# Altium PCB PCB1(pin2).PcbDoc
Units mm, origin at the board's own origin, x right, y up, seen from the top; angles counter-clockwise.
Board outline 100 x 100 mm, 2 copper layers (Top Layer, Bottom Layer); 184 components, 17 nets, 460 pads, 92 vias.
Unrouted connection lines stored in the file: 48.
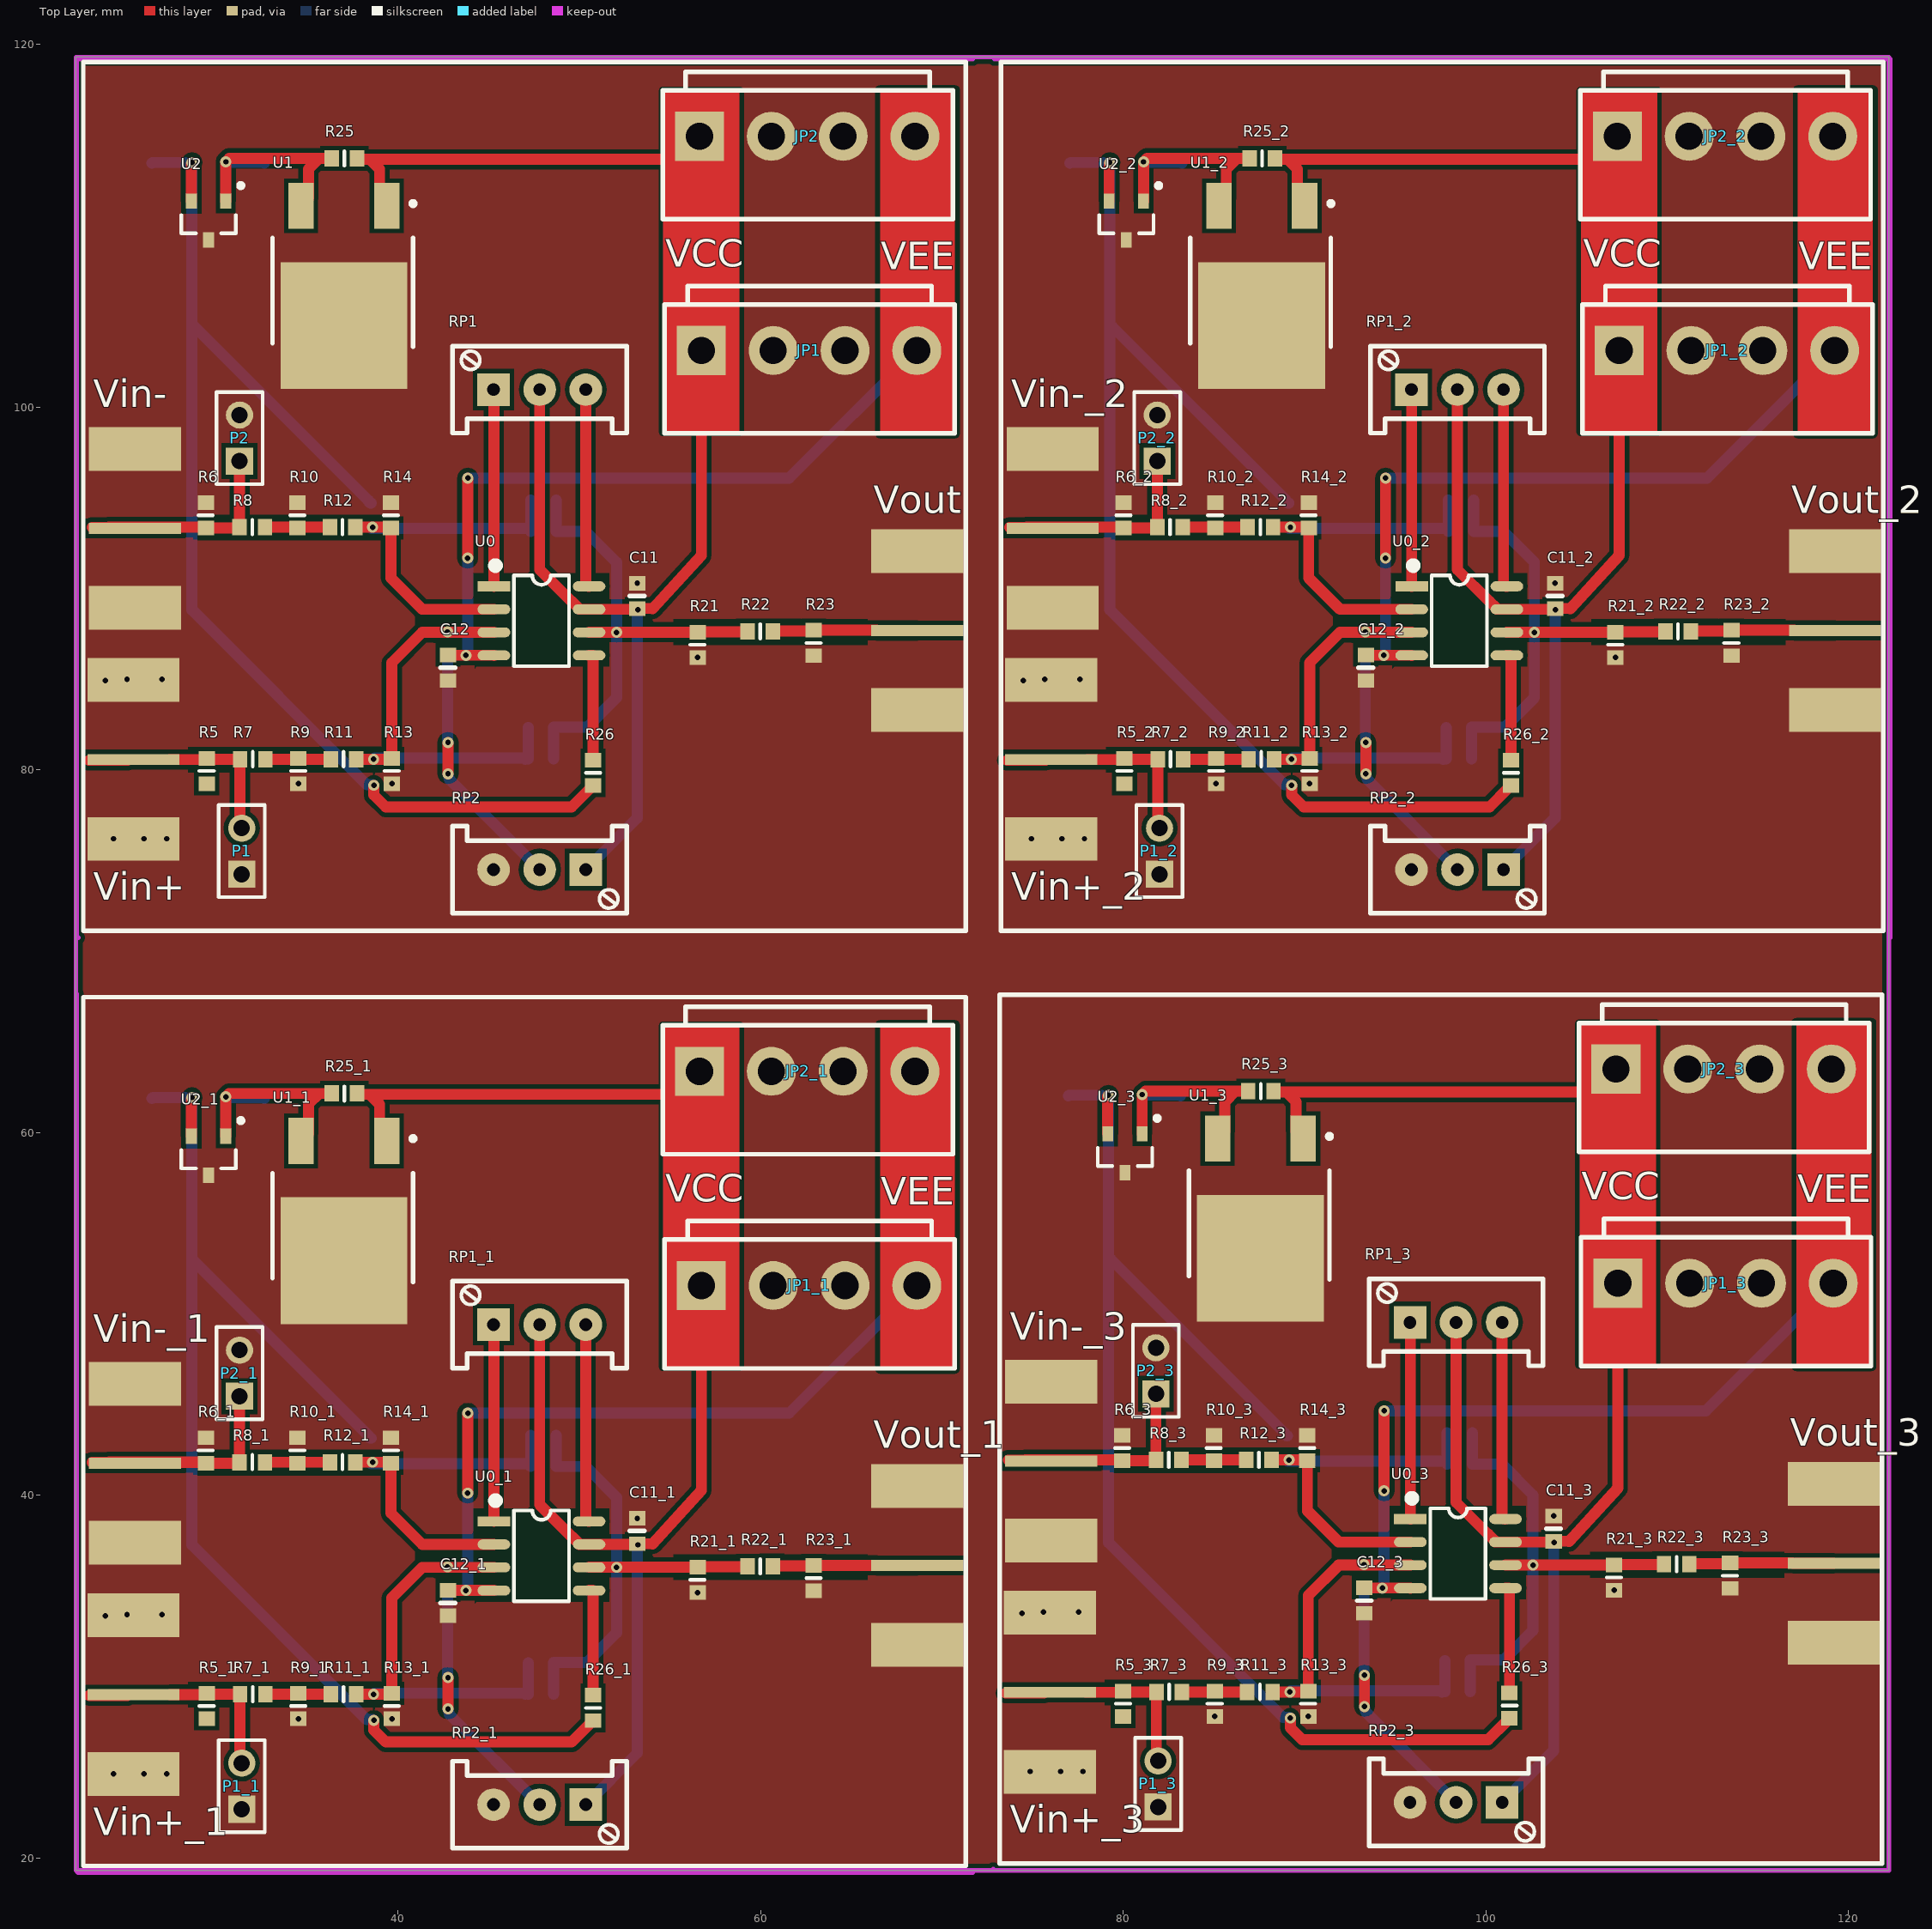
[diagram p0: Top Layer view]
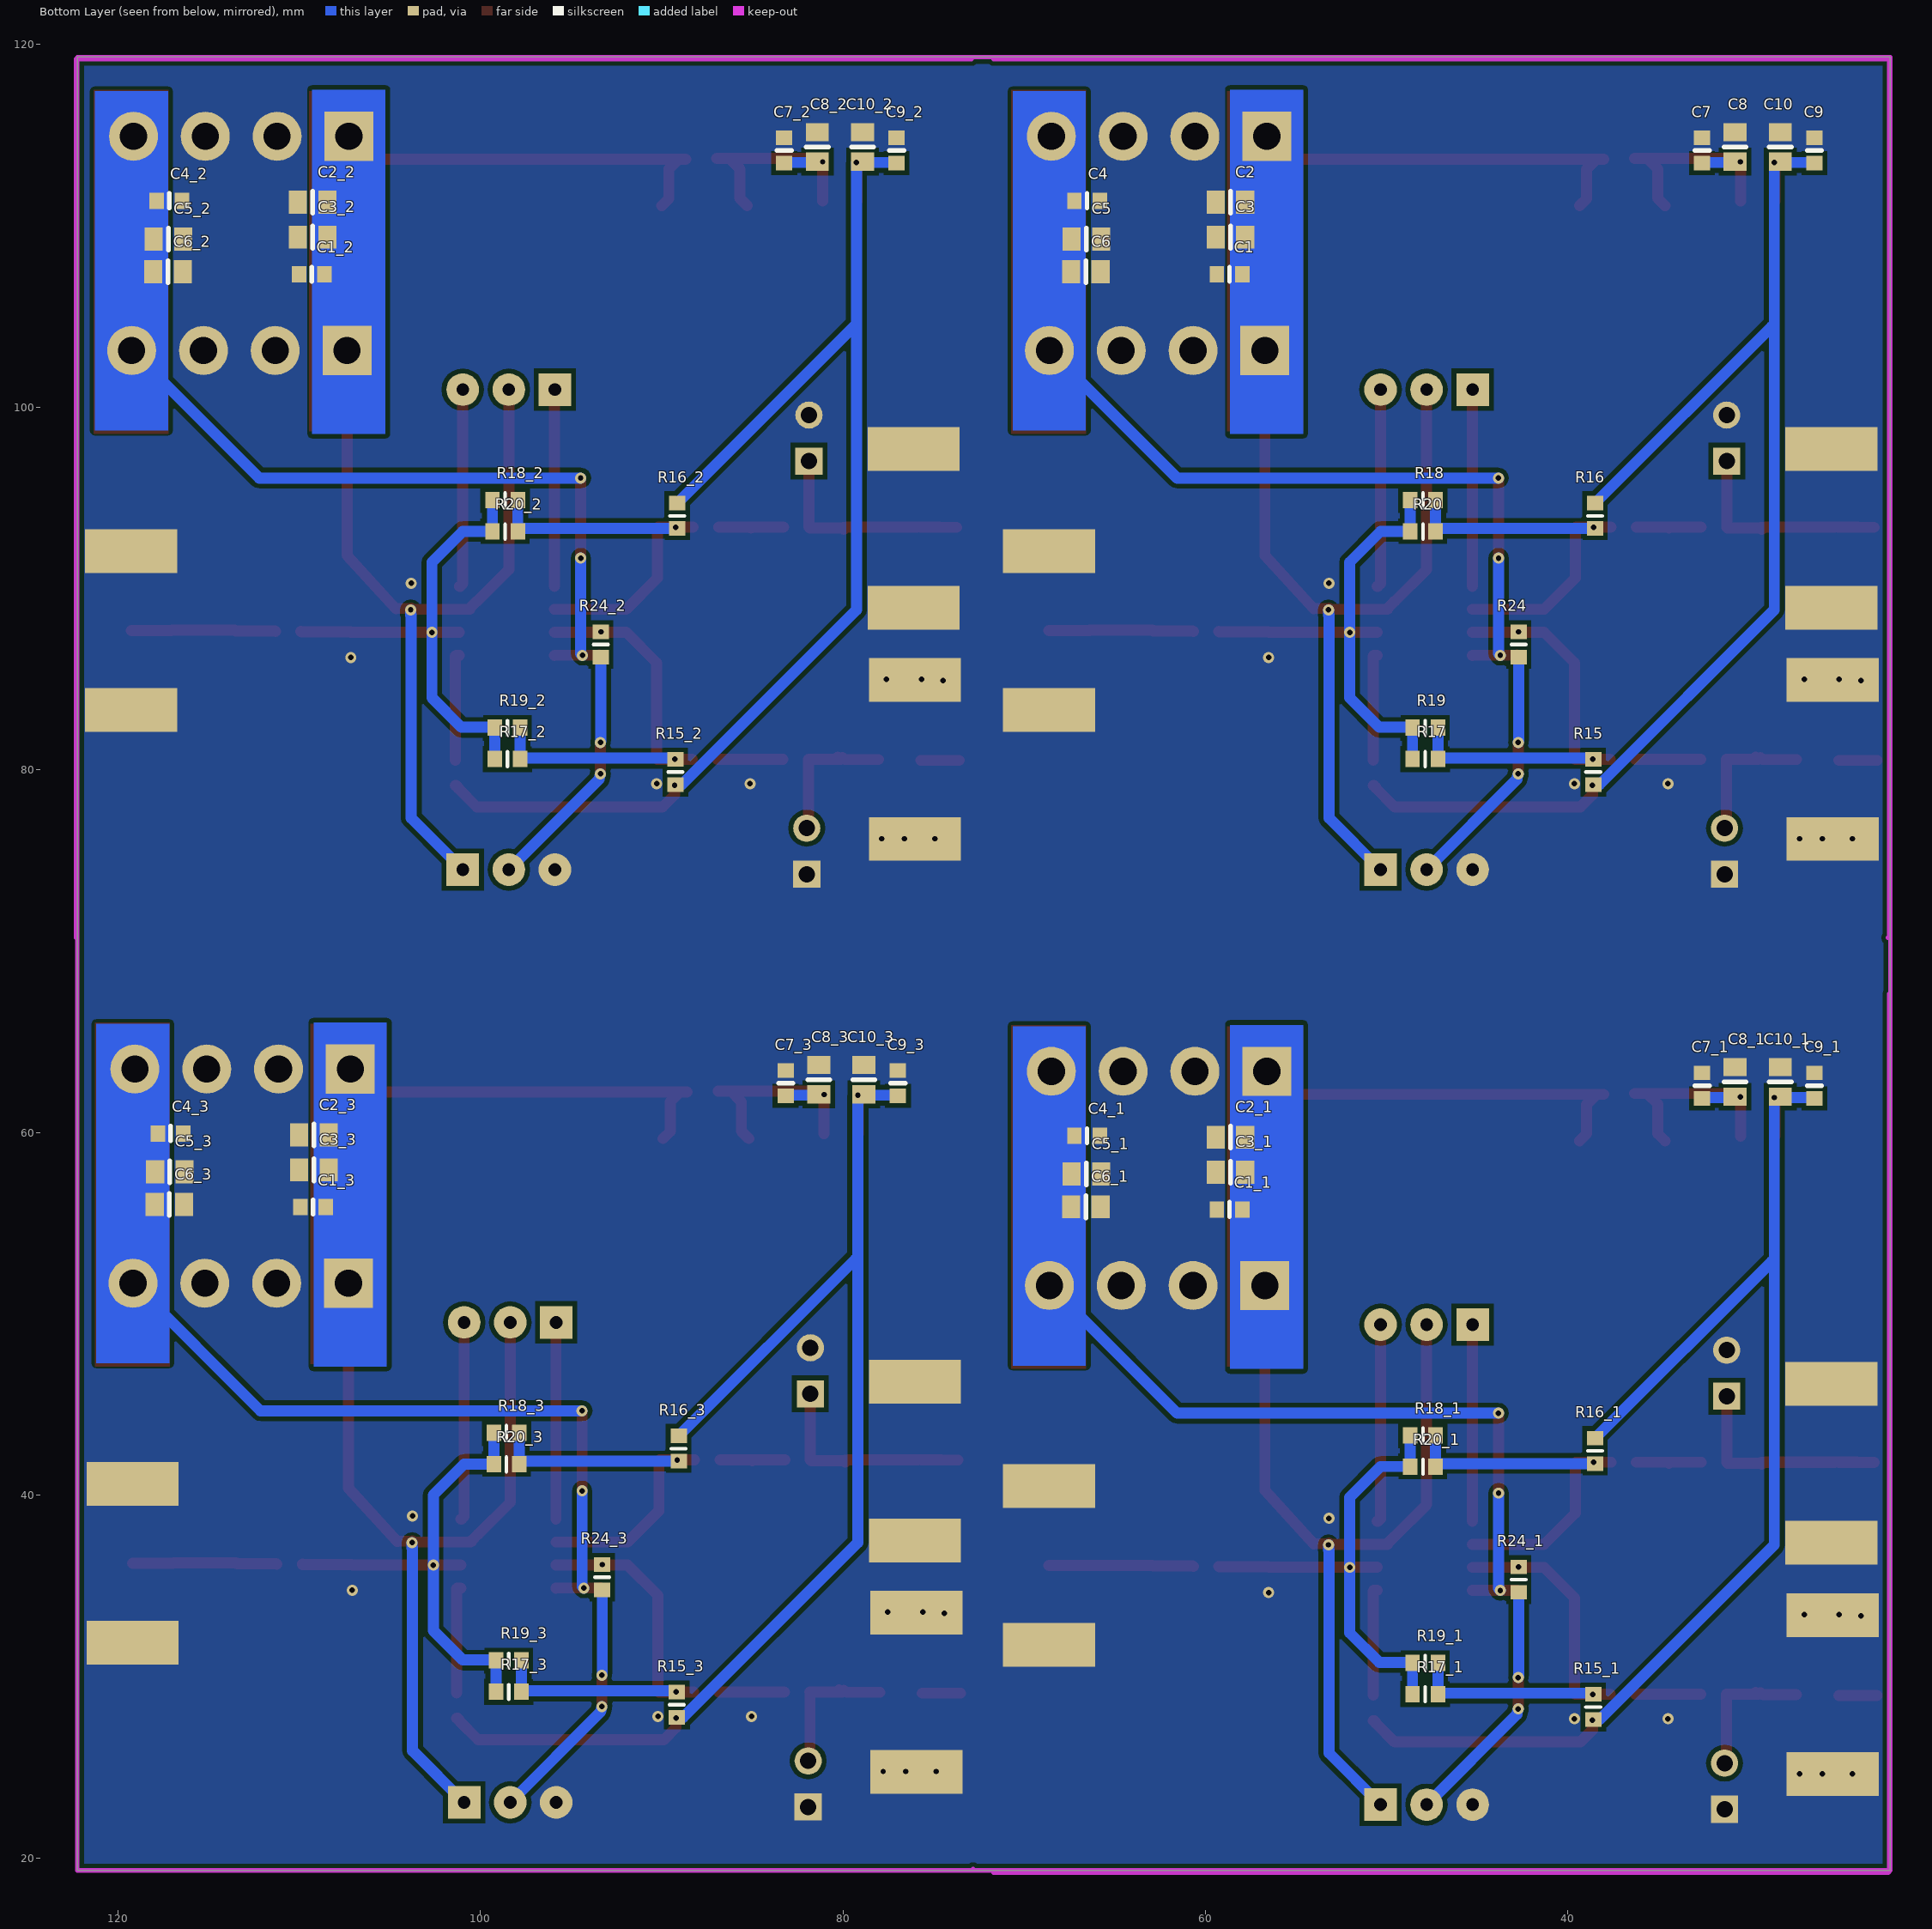
[diagram p1: Bottom Layer view, seen from below]

## Layer stack, top to bottom
Top Solder: solder mask 0.0102, Solder Resist, Dk 3.5
Top Layer: signal copper 0.0356
Dielectric 1: dielectric 0.32, FR-4, Dk 4.8
Bottom Layer: signal copper 0.0356
Bottom Solder: solder mask 0.0102, Solder Resist, Dk 3.5

## Board outline
22.225,19.304 122.225,19.304 122.225,119.304 22.225,119.304

## Design rules (kind name [scope] priority, off if disabled: settings)
Clearance [All] p1: gap=0.254 ignorepadtopadclearanceinfootprint=FALSE except(0: Arc-Hole Track-Hole SMDPad-Hole THPad-Hole Via-Hole Fill-Hole Poly-Hole Region-Hole Text-Hole)
PlaneConnect [All] p1: planeconnectstyle=Direct reliefexpansion=0.508 reliefentries=4 reliefconductorwidth=0.254 reliefairgap=0.254
PolygonConnect [All] p1: connectstyle=Direct reliefconductorwidth=0.254 reliefentries=4 polygonreliefangle="90 Angle" airgapwidth=0.254
RoutingVias [All] p1: holewidth=0.711 width=1.27 viastyle="Through Hole" minholewidth=0.711 minwidth=1.27 maxholewidth=0.711 maxwidth=1.27
SolderMaskExpansion [All] p1: expansion=0.102
Width [All] p1: maxlimit=0.254 minlimit=0.254 preferedwidth=0.254
29 further rules are at their usual default settings.

## Components (designator, comment, footprint, x,y, rotation, side; value= is the part's Value field where it differs from the comment)
C1 "Cap-S" C0603-L 58.674,107.315 r180 bottom value=100nF
C1_1 "Cap-S" C0603-L 58.674,55.753 r180 bottom value=100nF (schematic designator C1)
C1_2 "Cap-S" C0603-L 109.296,107.315 r180 bottom value=100nF (schematic designator C1)
C1_3 "Cap-S" C0603-L 109.22,55.88 r180 bottom value=100nF (schematic designator C1)
C2 "Cap-S" C0805-L 58.623,111.303 r180 bottom value=10μF
C2_1 "Cap-S" C0805-L 58.623,59.741 r180 bottom value=10μF (schematic designator C2)
C2_2 "Cap-S" C0805-L 109.245,111.303 r180 bottom value=10μF (schematic designator C2)
C2_3 "Cap-S" C0805-L 109.169,59.868 r180 bottom value=10μF (schematic designator C2)
C3 "Cap-S" C0805-L 58.623,109.372 r180 bottom value=47μF
C3_1 "Cap-S" C0805-L 58.623,57.81 r180 bottom value=47μF (schematic designator C3)
C3_2 "Cap-S" C0805-L 109.245,109.372 r180 bottom value=47μF (schematic designator C3)
C3_3 "Cap-S" C0805-L 109.169,57.937 r180 bottom value=47μF (schematic designator C3)
C4 "Cap-S" C0603-L 66.532,111.379 r180 bottom value=100nF
C4_1 "Cap-S" C0603-L 66.532,59.817 r180 bottom value=100nF (schematic designator C4)
C4_2 "Cap-S" C0603-L 117.154,111.379 r180 bottom value=100nF (schematic designator C4)
C4_3 "Cap-S" C0603-L 117.078,59.944 r180 bottom value=100nF (schematic designator C4)
C5 "Cap-S" C0805-L 66.573,109.271 r180 bottom value=10μF
C5_1 "Cap-S" C0805-L 66.573,57.709 r180 bottom value=10μF (schematic designator C5)
C5_2 "Cap-S" C0805-L 117.196,109.271 r180 bottom value=10μF (schematic designator C5)
C5_3 "Cap-S" C0805-L 117.12,57.836 r180 bottom value=10μF (schematic designator C5)
C6 "Cap-S" C0805-L 66.599,107.467 r180 bottom value=47μF
C6_1 "Cap-S" C0805-L 66.599,55.905 r180 bottom value=47μF (schematic designator C6)
C6_2 "Cap-S" C0805-L 117.221,107.467 r180 bottom value=47μF (schematic designator C6)
C6_3 "Cap-S" C0805-L 117.145,56.032 r180 bottom value=47μF (schematic designator C6)
C7 "Cap-S" C0603-L 32.614,114.148 r270 bottom value=100nF
C7_1 "Cap-S" C0603-L 32.614,62.586 r270 bottom value=100nF (schematic designator C7)
C7_2 "Cap-S" C0603-L 83.236,114.148 r270 bottom value=100nF (schematic designator C7)
C7_3 "Cap-S" C0603-L 83.16,62.713 r270 bottom value=100nF (schematic designator C7)
C8 "Cap-S" C0805-L 30.785,114.351 r270 bottom value=10μF
C8_1 "Cap-S" C0805-L 30.785,62.789 r270 bottom value=10μF (schematic designator C8)
C8_2 "Cap-S" C0805-L 81.407,114.351 r270 bottom value=10μF (schematic designator C8)
C8_3 "Cap-S" C0805-L 81.331,62.916 r270 bottom value=10μF (schematic designator C8)
C9 "Cap-S" C0603-L 26.416,114.148 r270 bottom value=100nF
C9_1 "Cap-S" C0603-L 26.416,62.586 r270 bottom value=100nF (schematic designator C9)
C9_2 "Cap-S" C0603-L 77.038,114.148 r270 bottom value=100nF (schematic designator C9)
C9_3 "Cap-S" C0603-L 76.962,62.713 r270 bottom value=100nF (schematic designator C9)
C10 "Cap-S" C0805-L 28.296,114.351 r270 bottom value=10μF
C10_1 "Cap-S" C0805-L 28.296,62.789 r270 bottom value=10μF (schematic designator C10)
C10_2 "Cap-S" C0805-L 78.918,114.351 r270 bottom value=10μF (schematic designator C10)
C10_3 "Cap-S" C0805-L 78.842,62.916 r270 bottom value=10μF (schematic designator C10)
C11 "Cap-S" C0603-L 53.188,89.586 r90 top value=100nF
C11_1 "Cap-S" C0603-L 53.188,38.024 r90 top value=100nF (schematic designator C11)
C11_2 "Cap-S" C0603-L 103.81,89.586 r90 top value=100nF (schematic designator C11)
C11_3 "Cap-S" C0603-L 103.734,38.151 r90 top value=100nF (schematic designator C11)
C12 "Cap-S" C0603-L 42.748,85.623 r90 top value=100nF
C12_1 "Cap-S" C0603-L 42.748,34.061 r90 top value=100nF (schematic designator C12)
C12_2 "Cap-S" C0603-L 93.37,85.623 r90 top value=100nF (schematic designator C12)
C12_3 "Cap-S" C0603-L 93.294,34.188 r90 top value=100nF (schematic designator C12)
JP1 "HDR-1X4" VH3.96-LI-4P 62.663,103.124 r0 top
JP1_1 "HDR-1X4" VH3.96-LI-4P 62.663,51.562 r0 top (schematic designator JP1)
JP1_2 "HDR-1X4" VH3.96-LI-4P 113.285,103.124 r0 top (schematic designator JP1)
JP1_3 "HDR-1X4" VH3.96-LI-4P 113.209,51.689 r0 top (schematic designator JP1)
JP2 "HDR-1X4" VH3.96-LI-4P 62.559,114.935 r0 top
JP2_1 "HDR-1X4" VH3.96-LI-4P 62.559,63.373 r0 top (schematic designator JP2)
JP2_2 "HDR-1X4" VH3.96-LI-4P 113.181,114.935 r0 top (schematic designator JP2)
JP2_3 "HDR-1X4" VH3.96-LI-4P 113.105,63.5 r0 top (schematic designator JP2)
P1 "Header 2" HDR1X2 31.369,74.244 r90 top
P1_1 "Header 2" HDR1X2 31.369,22.682 r90 top (schematic designator P1)
P1_2 "Header 2" HDR1X2 81.991,74.244 r90 top (schematic designator P1)
P1_3 "Header 2" HDR1X2 81.915,22.809 r90 top (schematic designator P1)
P2 "Header 2" HDR1X2 31.248,97.022 r90 top
P2_1 "Header 2" HDR1X2 31.248,45.46 r90 top (schematic designator P2)
P2_2 "Header 2" HDR1X2 81.87,97.022 r90 top (schematic designator P2)
P2_3 "Header 2" HDR1X2 81.794,45.587 r90 top (schematic designator P2)
R5 "R" R0603-L 29.439,79.934 r90 top value=NC
R5_1 "R" R0603-L 29.439,28.372 r90 top value=NC (schematic designator R5)
R5_2 "R" R0603-L 80.061,79.934 r90 top value=NC (schematic designator R5)
R5_3 "R" R0603-L 79.985,28.499 r90 top value=NC (schematic designator R5)
R6 "R" R0603-L 29.388,94.031 r90 top value=NC
R6_1 "R" R0603-L 29.388,42.469 r90 top value=NC (schematic designator R6)
R6_2 "R" R0603-L 80.01,94.031 r90 top value=NC (schematic designator R6)
R6_3 "R" R0603-L 79.934,42.596 r90 top value=NC (schematic designator R6)
R7 "R" R0603-L 31.979,80.584 r0 top value=NC
R7_1 "R" R0603-L 31.979,29.022 r0 top value=NC (schematic designator R7)
R7_2 "R" R0603-L 82.601,80.584 r0 top value=NC (schematic designator R7)
R7_3 "R" R0603-L 82.525,29.149 r0 top value=NC (schematic designator R7)
R8 "R" R0603-L 31.953,93.381 r0 top value=NC
R8_1 "R" R0603-L 31.953,41.819 r0 top value=NC (schematic designator R8)
R8_2 "R" R0603-L 82.575,93.381 r0 top value=NC (schematic designator R8)
R8_3 "R" R0603-L 82.499,41.946 r0 top value=NC (schematic designator R8)
R9 "R" R0603-L 34.493,79.934 r90 top value=NC
R9_1 "R" R0603-L 34.493,28.372 r90 top value=NC (schematic designator R9)
R9_2 "R" R0603-L 85.115,79.934 r90 top value=NC (schematic designator R9)
R9_3 "R" R0603-L 85.039,28.499 r90 top value=NC (schematic designator R9)
R10 "R" R0603-L 34.442,94.031 r90 top value=NC
R10_1 "R" R0603-L 34.442,42.469 r90 top value=NC (schematic designator R10)
R10_2 "R" R0603-L 85.065,94.031 r90 top value=NC (schematic designator R10)
R10_3 "R" R0603-L 84.989,42.596 r90 top value=NC (schematic designator R10)
R11 "R" R0603-L 36.982,80.584 r0 top value=NC
R11_1 "R" R0603-L 36.982,29.022 r0 top value=NC (schematic designator R11)
R11_2 "R" R0603-L 87.605,80.584 r0 top value=NC (schematic designator R11)
R11_3 "R" R0603-L 87.529,29.149 r0 top value=NC (schematic designator R11)
R12 "R" R0603-L 36.932,93.381 r0 top value=NC
R12_1 "R" R0603-L 36.932,41.819 r0 top value=NC (schematic designator R12)
R12_2 "R" R0603-L 87.554,93.381 r0 top value=NC (schematic designator R12)
R12_3 "R" R0603-L 87.478,41.946 r0 top value=NC (schematic designator R12)
R13 "R" R0603-L 39.649,79.934 r90 top value=NC
R13_1 "R" R0603-L 39.649,28.372 r90 top value=NC (schematic designator R13)
R13_2 "R" R0603-L 90.272,79.934 r90 top value=NC (schematic designator R13)
R13_3 "R" R0603-L 90.196,28.499 r90 top value=NC (schematic designator R13)
R14 "R" R0603-L 39.599,94.031 r90 top value=NC
R14_1 "R" R0603-L 39.599,42.469 r90 top value=NC (schematic designator R14)
R14_2 "R" R0603-L 90.221,94.031 r90 top value=NC (schematic designator R14)
R14_3 "R" R0603-L 90.145,42.596 r90 top value=NC (schematic designator R14)
R15 "R" R0603-L 38.608,79.883 r90 bottom value=NC
R15_1 "R" R0603-L 38.608,28.321 r90 bottom value=NC (schematic designator R15)
R15_2 "R" R0603-L 89.23,79.883 r90 bottom value=NC (schematic designator R15)
R15_3 "R" R0603-L 89.154,28.448 r90 bottom value=NC (schematic designator R15)
R16 "R" R0603-L 38.506,94.005 r90 bottom value=NC
R16_1 "R" R0603-L 38.506,42.443 r90 bottom value=NC (schematic designator R16)
R16_2 "R" R0603-L 89.129,94.005 r90 bottom value=NC (schematic designator R16)
R16_3 "R" R0603-L 89.053,42.57 r90 bottom value=NC (schematic designator R16)
R17 "R" R0603-L 47.879,80.594 r0 bottom value=NC
R17_1 "R" R0603-L 47.879,29.032 r0 bottom value=NC (schematic designator R17)
R17_2 "R" R0603-L 98.501,80.594 r0 bottom value=NC (schematic designator R17)
R17_3 "R" R0603-L 98.425,29.159 r0 bottom value=NC (schematic designator R17)
R18 "R" R0603-L 48.006,94.869 r0 bottom value=NC
R18_1 "R" R0603-L 48.006,43.307 r0 bottom value=NC (schematic designator R18)
R18_2 "R" R0603-L 98.628,94.869 r0 bottom value=NC (schematic designator R18)
R18_3 "R" R0603-L 98.552,43.434 r0 bottom value=NC (schematic designator R18)
R19 "R" R0603-L 47.879,82.321 r0 bottom value=NC
R19_1 "R" R0603-L 47.879,30.759 r0 bottom value=NC (schematic designator R19)
R19_2 "R" R0603-L 98.501,82.321 r0 bottom value=NC (schematic designator R19)
R19_3 "R" R0603-L 98.425,30.886 r0 bottom value=NC (schematic designator R19)
R20 "R" R0603-L 48.006,93.142 r0 bottom value=NC
R20_1 "R" R0603-L 48.006,41.58 r0 bottom value=NC (schematic designator R20)
R20_2 "R" R0603-L 98.628,93.142 r0 bottom value=NC (schematic designator R20)
R20_3 "R" R0603-L 98.552,41.707 r0 bottom value=NC (schematic designator R20)
R21 "R" R0603-L 56.515,86.893 r90 top value=NC
R21_1 "R" R0603-L 56.515,35.331 r90 top value=NC (schematic designator R21)
R21_2 "R" R0603-L 107.137,86.893 r90 top value=NC (schematic designator R21)
R21_3 "R" R0603-L 107.061,35.458 r90 top value=NC (schematic designator R21)
R22 "R" R0603-L 59.969,87.63 r0 top value=NC
R22_1 "R" R0603-L 59.969,36.068 r0 top value=NC (schematic designator R22)
R22_2 "R" R0603-L 110.592,87.63 r0 top value=NC (schematic designator R22)
R22_3 "R" R0603-L 110.516,36.195 r0 top value=NC (schematic designator R22)
R23 "R" R0603-L 62.916,86.995 r90 top value=NC
R23_1 "R" R0603-L 62.916,35.433 r90 top value=NC (schematic designator R23)
R23_2 "R" R0603-L 113.538,86.995 r90 top value=NC (schematic designator R23)
R23_3 "R" R0603-L 113.462,35.56 r90 top value=NC (schematic designator R23)
R24 "R" R0603-L 42.723,86.908 r90 bottom value=NC
R24_1 "R" R0603-L 42.723,35.346 r90 bottom value=NC (schematic designator R24)
R24_2 "R" R0603-L 93.345,86.908 r90 bottom value=NC (schematic designator R24)
R24_3 "R" R0603-L 93.269,35.473 r90 bottom value=NC (schematic designator R24)
R25 "R" R0603-L 37.033,113.716 r180 top value=NC
R25_1 "R" R0603-L 37.033,62.154 r180 top value=NC (schematic designator R25)
R25_2 "R" R0603-L 87.655,113.716 r180 top value=NC (schematic designator R25)
R25_3 "R" R0603-L 87.579,62.281 r180 top value=NC (schematic designator R25)
R26 "R" R0603-L 50.749,79.832 r270 top value=NC
R26_1 "R" R0603-L 50.749,28.27 r270 top value=NC (schematic designator R26)
R26_2 "R" R0603-L 101.371,79.832 r270 top value=NC (schematic designator R26)
R26_3 "R" R0603-L 101.295,28.397 r270 top value=NC (schematic designator R26)
RP1 "1K" 3296W 47.803,100.965 r0 top
RP1_1 "1K" 3296W 47.803,49.403 r0 top (schematic designator RP1)
RP1_2 "1K" 3296W 98.425,100.965 r0 top (schematic designator RP1)
RP1_3 "1K" 3296W 98.349,49.53 r0 top (schematic designator RP1)
RP2 "100K" 3296W 47.803,74.498 r180 top
RP2_1 "100K" 3296W 47.803,22.936 r180 top (schematic designator RP2)
RP2_2 "100K" 3296W 98.425,74.498 r180 top (schematic designator RP2)
RP2_3 "100K" 3296W 98.349,23.063 r180 top (schematic designator RP2)
U0 "OPA277" SOP8_N 47.904,88.214 r0 top
U0_1 "OPA277" SOP8_N 47.904,36.652 r0 top (schematic designator U0)
U0_2 "OPA277" SOP8_N 98.527,88.214 r0 top (schematic designator U0)
U0_3 "OPA277" SOP8_N 98.451,36.779 r0 top (schematic designator U0)
U1 "78M05" TO-252 37.008,107.798 r180 top
U1_1 "78M05" TO-252 37.008,56.236 r180 top (schematic designator U1)
U1_2 "78M05" TO-252 87.63,107.798 r180 top (schematic designator U1)
U1_3 "78M05" TO-252 87.554,56.363 r180 top (schematic designator U1)
U2 "REF30xx" SOT23-3_L 29.54,110.287 r270 top
U2_1 "REF30xx" SOT23-3_L 29.54,58.725 r270 top (schematic designator U2)
U2_2 "REF30xx" SOT23-3_L 80.162,110.287 r270 top (schematic designator U2)
U2_3 "REF30xx" SOT23-3_L 80.086,58.852 r270 top (schematic designator U2)
Vin+ "SMA" SMA1 25.4,80.569 r0 top
Vin+_1 "SMA" SMA1 25.4,29.007 r0 top (schematic designator Vin+)
Vin+_2 "SMA" SMA1 76.022,80.569 r0 top (schematic designator Vin+)
Vin+_3 "SMA" SMA1 75.946,29.134 r0 top (schematic designator Vin+)
Vin- "SMA" SMA1 25.476,93.32 r0 top
Vin-_1 "SMA" SMA1 25.476,41.758 r0 top (schematic designator Vin-)
Vin-_2 "SMA" SMA1 76.098,93.32 r0 top (schematic designator Vin-)
Vin-_3 "SMA" SMA1 76.022,41.885 r0 top (schematic designator Vin-)
Vout "SMA" SMA1 68.631,87.681 r180 top
Vout_1 "SMA" SMA1 68.631,36.119 r180 top (schematic designator Vout)
Vout_2 "SMA" SMA1 119.253,87.681 r180 top (schematic designator Vout)
Vout_3 "SMA" SMA1 119.177,36.246 r180 top (schematic designator Vout)

## Footprints (in the part's own frame and the unit in brackets; to place one, negate y for a bottom-side part, rotate by r counter-clockwise, add the part's x,y. Pads: shape width x height; smd on the part's side, far side on the other; paste and mask are expansions set on the pad)
3296W [mm] "Precise Multi-Winding Adjustable Resistor"
  rect 1.8x1.8 hole 0.7: 1(-2.54,0)
  round 1.8 hole 0.7: 2(0,0) 3(2.54,0)
  silkscreen extent -4.8,-2.4 4.8,2.4, body extent -4.75,-2.4 4.75,2.4, height 11.52
C0603-L [mm] "贴片电容0603 高密度"
  rect 0.8x0.9 smd: 1(-0.7,0) 2(0.7,0)
  silkscreen extent 0,-0.39 0,0.41, body extent -0.8,-0.4 0.8,0.41, height 0.88
C0805-L [mm] "贴片电容0805-高密度"
  rect 1x1.27 smd: 1(-0.813,0) 2(0.813,0)
  silkscreen extent 0,-0.61 0,0.61, body extent -1,-0.63 1,0.62, height 0.6
HDR1X2 [mm] "Connector; Header; 2 Position"
  rect 1.5x1.5 hole 0.9: 1(0,0)
  round 1.5 hole 0.9: 2(2.54,0)
  silkscreen extent -1.27,-1.27 3.81,1.27
R0603-L [mm] "贴片电阻0603 高密度"
  rect 0.8x0.9 smd: 1(-0.7,0) 2(0.7,0)
  silkscreen extent 0,-0.39 0,0.41, body extent -0.81,-0.43 0.79,0.39, height 0.53
SMA1 [mil]
  rect 200x24 smd: 1(0,0)
  rect 200x95 smd: 2(0,-172.5) 2(0,172.5)
  rect 200x95 smd far side: 2(0,-172.5) 2(0,172.5)
  body extent -475,-187 87,187, height 171
SOP8_N [mm] "5*6*1.8mm（长宽高）"
  rect 1.8x0.55 smd: 1(-2.625,1.905)
  oval 1.8x0.55 smd: 2(-2.625,0.635) 3(-2.625,-0.635) 4(-2.625,-1.905) 5(2.625,-1.905) 6(2.625,-0.635) 7(2.625,0.635) 8(2.625,1.905)
  silkscreen extent -2.69,-2.5 1.52,3.2, body extent -3,-2.5 3,2.5, height 1.9
SOT23-3_L [mm] "SOT23, 3-Leads, Body 2.9x1.3mm, Pitch 0.95mm, Lead Span 2.3mm - Reverse Pinning, IPC High Density"
  rect 0.85x0.6 smd: 1(-1.075,0.95) 2(-1.075,-0.95) 3(1.075,0)
  silkscreen extent -2.06,-1.5 0.7,1.9, body extent -1.39,-1.46 1.41,1.44, height 1.2
TO-252 [mil]
  rect 55.12x100 smd: 1(-93,-130) 3(93,-130)
  rect 275.59x275.59 smd: 2(0,130)
  silkscreen extent -155,-140 155,176, body extent -129,-150 129,241, height 94
VH3.96-LI-4P [mm] "接插件，25V/5A"
  rect 2.7x2.7 hole 1.5: 1(-5.94,0)
  round 2.7 hole 1.5: 2(-1.978,0) 3(1.982,0) 4(5.942,0)
  silkscreen extent -7.97,-4.57 8.03,3.56, body extent -7.94,-4.4 7.99,4.16, height 10.5

## Part data
C1 C1_1 C1_2 C1_3 C2 C2_1 C2_2 C2_3 C3 C3_1 C3_2 C3_3 C4 C4_1 C4_2 C4_3 C5 C5_1 C5_2 C5_3 C6 C6_1 C6_2 C6_3 C7 C7_1 C7_2 C7_3 C8 C8_1 C8_2 C8_3 C9 C9_1 C9_2 C9_3 C10 C10_1 C10_2 C10_3 C11 C11_1 C11_2 C11_3 C12 C12_1 C12_2 C12_3: "贴片瓷片电容"
JP1 JP1_1 JP1_2 JP1_3 JP2 JP2_1 JP2_2 JP2_3: library part "Header 4", "4P接插件", BOM名称=4P, 学习资源=www.oooc
P1 P1_1 P1_2 P1_3 P2 P2_1 P2_2 P2_3: "Header, 2-Pin", LatestRevisionDate=17-Jul-2002, LatestRevisionNote="Re-released for DXP Platform.", Publisher="Altium Limited"
R5 R5_1 R5_2 R5_3 R6 R6_1 R6_2 R6_3 R7 R7_1 R7_2 R7_3 R8 R8_1 R8_2 R8_3 R9 R9_1 R9_2 R9_3 R10 R10_1 R10_2 R10_3 R11 R11_1 R11_2 R11_3 R12 R12_1 R12_2 R12_3 R13 R13_1 R13_2 R13_3 R14 R14_1 R14_2 R14_3 R15 R15_1 R15_2 R15_3 R16 R16_1 R16_2 R16_3 R17 R17_1 R17_2 R17_3 R18 R18_1 R18_2 R18_3 R19 R19_1 R19_2 R19_3 R20 R20_1 R20_2 R20_3 R21 R21_1 R21_2 R21_3 R22 R22_1 R22_2 R22_3 R23 R23_1 R23_2 R23_3 R24 R24_1 R24_2 R24_3 R25 R25_1 R25_2 R25_3 R26 R26_1 R26_2 R26_3: library part Res, "贴片电阻"
RP1 RP1_1 RP1_2 RP1_3 RP2 RP2_1 RP2_2 RP2_3: library part RP-ID, "插件单联电位器", BOM名称=², 学习资源=www.oooc
U0 U0_1 U0_2 U0_3: "双电源高精度运放", BOM名称=Ë«µ, 学习资源=www.oooc
U2 U2_1 U2_2 U2_3: library part REF3025, "采用 SOT23-3 封装的 2.5V 输出 50ppm/℃ 漂移 50uA 静态电流的（带隙）电压参考"

## Via types
v1: diameter 0.61, hole 0.305, Top Layer to Bottom Layer, 92 vias

## Nets (pads, with @x,y where several pads share a name; then routed paths per layer and width w, separated by ;. In a path a pad name is that pad's centre, name@x,y a point inside that pad or via, vN(x,y) a via of type N, cw(c..) or ccw(c..) an arc to the next point about the centre after c; other vN are vias at no path point)
+5: C7.2 C7_1.2 C7_2.2 C7_3.2 C8.2 C8_1.2 C8_2.2 C8_3.2 R25.2 R25_1.2 R25_2.2 R25_3.2 U1.3 U1_1.3 U1_2.3 U1_3.3 U2.1 U2_1.1 U2_2.1 U2_3.1 | length 51.9
  Top Layer w0.61: U2_1.1 v1(30.49,61.966) 30.678,62.154 35.638,62.154 ; U2.1 v1(30.49,113.528) 30.678,113.716 35.638,113.716 ; U1_1.3 35.052,59.944 35.052,61.568 35.638,62.154 ; U1.3 35.052,111.506 35.052,113.13 35.638,113.716 ; R25_1.2 35.638,62.154 ; R25.2 35.638,113.716 ; U2_3.1 v1(81.036,62.093) 81.224,62.281 86.184,62.281 ; U2_2.1 v1(81.112,113.528) 81.3,113.716 86.26,113.716 ; U1_3.3 85.598,60.071 85.598,61.695 86.184,62.281 ; U1_2.3 85.674,111.506 85.674,113.13 86.26,113.716 ; R25_3.2 86.184,62.281 ; R25_2.2 86.26,113.716
  Bottom Layer w0.61: C8_1.2 30.83,61.931 32.568,61.931 C7_1.2 ; C8.2 30.83,113.493 32.568,113.493 C7.2 ; C8_3.2 81.376,62.058 83.115,62.058 C7_3.2 ; C8_2.2 81.452,113.493 83.191,113.493 C7_2.2
GND: C1.1 C1_1.1 C1_2.1 C1_3.1 C2.1 C2_1.1 C2_2.1 C2_3.1 C3.1 C3_1.1 C3_2.1 C3_3.1 C4.2 C4_1.2 C4_2.2 C4_3.2 C5.2 C5_1.2 C5_2.2 C5_3.2 C6.2 C6_1.2 C6_2.2 C6_3.2 C7.1 C7_1.1 C7_2.1 C7_3.1 C8.1 C8_1.1 C8_2.1 C8_3.1 C9.1 C9_1.1 C9_2.1 C9_3.1 C10.1 C10_1.1 C10_2.1 C10_3.1 C11.2 C11_1.2 C11_2.2 C11_3.2 C12.1 C12_1.1 C12_2.1 C12_3.1 JP1.2 JP1.3 JP1_1.2 JP1_1.3 JP1_2.2 JP1_2.3 JP1_3.2 JP1_3.3 JP2.2 JP2.3 JP2_1.2 JP2_1.3 JP2_2.2 JP2_2.3 JP2_3.2 JP2_3.3 P1.1 P1_1.1 P1_2.1 P1_3.1 P2.2 P2_1.2 P2_2.2 P2_3.2 R6.2 R6_1.2 R6_2.2 R6_3.2 R9.1 R9_1.1 R9_2.1 R9_3.1 R10.2 R10_1.2 R10_2.2 R10_3.2 R13.1 R13_1.1 R13_2.1 R13_3.1 R14.2 R14_1.2 R14_2.2 R14_3.2 R21.1 R21_1.1 R21_2.1 R21_3.1 R23.1 R23_1.1 R23_2.1 R23_3.1 RP2.3 RP2_1.3 RP2_2.3 RP2_3.3 U1.2 U1_1.2 U1_2.2 U1_3.2 U2.3 U2_1.3 U2_2.3 U2_3.3 Vin+.2 Vin+_1.2 Vin+_2.2 Vin+_3.2 Vin-.2 Vin-_1.2 Vin-_2.2 Vin-_3.2 Vout.2 Vout_1.2 Vout_2.2 Vout_3.2
  other v1: 24.308,24.638 25.984,24.638 27.229,24.638 74.854,24.765 76.53,24.765 77.775,24.765 34.493,27.672 39.649,27.672 85.039,27.799 90.196,27.799 23.851,33.35 25.044,33.426 26.975,33.426 74.397,33.477 75.591,33.553 77.521,33.553 56.515,34.631 107.061,34.758 53.188,38.724 103.734,38.851 24.308,76.2 25.984,76.2 27.229,76.2 74.93,76.2 76.606,76.2 77.851,76.2 34.493,79.234 39.649,79.234 85.115,79.234 90.272,79.234 23.851,84.912 74.473,84.912 25.044,84.988 26.975,84.988 75.667,84.988 77.597,84.988 56.515,86.193 107.137,86.193 53.188,90.286 103.81,90.286
NetP1_2: P1.2 P1_1.2 P1_2.2 P1_3.2 R5.2 R5_1.2 R5_2.2 R5_3.2 R7.1 R7_1.1 R7_2.1 R7_3.1 Vin+.1 Vin+_1.1 Vin+_2.1 Vin+_3.1 | length 37.5
  Top Layer w0.61: Vin+_1.1@22.962,28.956 Vin+_1.1@25.07,28.956 ; Vin+.1@22.962,80.518 Vin+.1@25.07,80.518 ; Vin+_1.1@27.407,29.007 R5_1.2@29.25,29.007 ; Vin+.1@27.407,80.569 R5.2@29.25,80.569 ; R5_1.2@29.402,29.108 R5_1.2 29.489,29.022 R7_1.1@31.267,29.022 ; R5.2@29.402,80.67 R5.2 29.489,80.584 R7.1@31.267,80.584 ; R5_1.2@29.656,29.134 R5_1.2@29.718,29.072 ; R5.2@29.656,80.696 R5.2@29.718,80.634 ; P1_1.2@31.267,25.603 R7_1.1@31.267,29.022 ; P1.2@31.267,77.165 R7.1@31.267,80.584 ; R7_1.1 R7_1.1@31.267,29.022 ; R7.1 R7.1@31.267,80.584 ; Vin+_3.1@73.508,29.083 Vin+_3.1@75.616,29.083 ; Vin+_2.1@73.584,80.518 Vin+_2.1@75.692,80.518 ; Vin+_3.1@77.953,29.134 R5_3.2@79.796,29.134 ; Vin+_2.1@78.029,80.569 R5_2.2@79.872,80.569 ; R5_3.2@79.948,29.235 R5_3.2 80.035,29.149 R7_3.1@81.814,29.149 ; R5_2.2@80.024,80.67 R5_2.2 80.111,80.584 R7_2.1@81.89,80.584 ; R5_3.2@80.202,29.261 R5_3.2@80.264,29.199 ; R5_2.2@80.278,80.696 R5_2.2@80.34,80.634 ; P1_3.2@81.814,25.73 R7_3.1@81.814,29.149 ; R7_3.1 R7_3.1@81.814,29.149 ; P1_2.2@81.89,77.165 R7_2.1@81.89,80.584 ; R7_2.1 R7_2.1@81.89,80.584
NetP2_1: P2.1 P2_1.1 P2_2.1 P2_3.1 R6.1 R6_1.1 R6_2.1 R6_3.1 R8.1 R8_1.1 R8_2.1 R8_3.1 Vin-.1 Vin-_1.1 Vin-_2.1 Vin-_3.1 | length 67.2
  Top Layer w0.61: Vin-_1.1@23.114,41.808 24.054,41.808 Vin-_1.1@25.095,41.808 ; Vin-.1@23.114,93.37 24.054,93.37 Vin-.1@25.095,93.37 ; Vin-_1.1@24.054,41.834 25.298,41.834 R6_1.1@29.145,41.834 ; Vin-.1@24.054,93.396 25.298,93.396 R6.1@29.145,93.396 ; Vin-_1.1@25.298,41.808 29.348,41.808 R6_1.1 ; Vin-.1@25.298,93.37 29.348,93.37 R6.1 ; R6_1.1@29.326,41.707 R6_1.1 ; R6.1@29.326,93.269 R6.1 ; P2_1.1@31.242,45.466 P2_1.1 31.248,41.824 R8_1.1 31.203,41.769 R6_1.1 ; P2.1@31.242,97.028 P2.1 31.248,93.386 R8.1 31.203,93.331 R6.1 ; Vin-_3.1@73.66,41.935 74.6,41.935 Vin-_3.1@75.641,41.935 ; Vin-_2.1@73.736,93.37 74.676,93.37 Vin-_2.1@75.717,93.37 ; Vin-_3.1@74.6,41.961 75.845,41.961 R6_3.1@79.691,41.961 ; Vin-_2.1@74.676,93.396 75.921,93.396 R6_2.1@79.767,93.396 ; Vin-_3.1@75.845,41.935 79.894,41.935 R6_3.1 ; Vin-_2.1@75.921,93.37 79.97,93.37 R6_2.1 ; R6_3.1@79.872,41.834 R6_3.1 ; R6_2.1@79.948,93.269 R6_2.1 ; P2_3.1@81.788,45.593 P2_3.1 81.794,41.951 R8_3.1 81.749,41.896 R6_3.1 ; P2_2.1@81.864,97.028 P2_2.1 81.87,93.386 R8_2.1 81.825,93.331 R6_2.1
NetR7_2: R7.2 R7_1.2 R7_2.2 R7_3.2 R9.2 R9_1.2 R9_2.2 R9_3.2 R11.1 R11_1.1 R11_2.1 R11_3.1 | length 14.4
  Top Layer w0.61: R7_1.2 34.443,29.022 R11_1.1 ; R7.2 34.443,80.584 R11.1 ; R7_3.2 84.989,29.149 R11_3.1 ; R7_2.2 85.065,80.584 R11_2.1
NetR8_2: R8.2 R8_1.2 R8_2.2 R8_3.2 R10.1 R10_1.1 R10_2.1 R10_3.1 R12.1 R12_1.1 R12_2.1 R12_3.1 | length 14.5
  Top Layer w0.61: R8_1.2 34.392,41.819 R10_1.1 34.492,41.819 R12_1.1 ; R8.2 34.392,93.381 R10.1 34.492,93.381 R12.1 ; R8_3.2 84.939,41.946 R10_3.1 85.039,41.946 R12_3.1 ; R8_2.2 85.015,93.381 R10_2.1 85.115,93.381 R12_2.1
NetR11_2: R11.2 R11_1.2 R11_2.2 R11_3.2 R13.2 R13_1.2 R13_2.2 R13_3.2 R15.2 R15_1.2 R15_2.2 R15_3.2 R17.1 R17_1.1 R17_2.1 R17_3.1 R19.1 R19_1.1 R19_2.1 R19_3.1 R24.2 R24_1.2 R24_2.2 R24_3.2 U0.3 U0_1.3 U0_2.3 U0_3.3 | length 95.1
  Top Layer w0.61: R11_1.2 39.599,29.022 R13_1.2 39.649,34.341 41.326,36.017 U0_1.3 ; R11.2 39.599,80.584 R13.2 39.649,85.903 41.326,87.579 U0.3 ; R11_3.2 90.146,29.149 R13_3.2 90.196,34.468 91.872,36.144 U0_3.3 ; R11_2.2 90.222,80.584 R13_2.2 90.272,85.903 91.948,87.579 U0_2.3
  Bottom Layer w0.61: R15_1.2 38.67,29.083 46.953,29.083 R17_1.1@47.015,29.021 ; R15.2 38.67,80.645 46.953,80.645 R17.1@47.015,80.583 ; R17_1.1 R19_1.1 ; R17.1 R19.1 ; R15_3.2 89.216,29.21 97.499,29.21 R17_3.1@97.561,29.148 ; R15_2.2 89.292,80.645 97.575,80.645 R17_2.1@97.637,80.583 ; R17_3.1 R19_3.1 ; R17_2.1 R19_2.1
  other v1: 38.641,29.022 89.187,29.149 42.723,36.046 93.269,36.173 38.641,80.584 89.263,80.584 42.723,87.608 93.345,87.608
NetR12_2: R12.2 R12_1.2 R12_2.2 R12_3.2 R14.1 R14_1.1 R14_2.1 R14_3.1 R16.1 R16_1.1 R16_2.1 R16_3.1 R18.1 R18_1.1 R18_2.1 R18_3.1 R20.1 R20_1.1 R20_2.1 R20_3.1 U0.2 U0_1.2 U0_2.2 U0_3.2 | length 86.8
  Top Layer w0.61: R12_1.2 39.549,41.819 R14_1.1 39.599,39.014 41.326,37.287 U0_1.2 ; R12.2 39.549,93.381 R14.1 39.599,90.576 41.326,88.849 U0.2 ; R12_3.2 90.095,41.946 R14_3.1 90.145,39.141 91.872,37.414 U0_3.2 ; R12_2.2 90.171,93.381 R14_2.1 90.221,90.576 91.948,88.849 U0_2.2
  Bottom Layer w0.61: R16_1.1 47.142,41.743 47.161,41.725 47.211,41.725 R20_1.1@47.306,41.63 ; R16.1 47.142,93.305 47.161,93.287 47.211,93.287 R20.1@47.306,93.192 ; R20_1.1 R20_1.1@47.306,41.63 ; R18_1.1 R20_1.1@47.306,41.63 ; R20.1 R20.1@47.306,93.192 ; R18.1 R20.1@47.306,93.192 ; R16_3.1 97.689,41.87 97.707,41.852 97.757,41.852 R20_3.1@97.852,41.757 ; R16_2.1 97.765,93.305 97.783,93.287 97.833,93.287 R20_2.1@97.928,93.192 ; R20_3.1 R20_3.1@97.852,41.757 ; R18_3.1 R20_3.1@97.852,41.757 ; R20_2.1 R20_2.1@97.928,93.192 ; R18_2.1 R20_2.1@97.928,93.192
  other v1: 38.59,41.819 89.136,41.946 38.59,93.381 89.212,93.381
NetR17_2: R17.2 R17_1.2 R17_2.2 R17_3.2 R18.2 R18_1.2 R18_2.2 R18_3.2 R19.2 R19_1.2 R19_2.2 R19_3.2 R20.2 R20_1.2 R20_2.2 R20_3.2 R21.2 R21_1.2 R21_2.2 R21_3.2 R22.1 R22_1.1 R22_2.1 R22_3.1 U0.6 U0_1.6 U0_2.6 U0_3.6 | length 111.5
  Top Layer w0.61: U0_1.6 50.537,36.024 56.508,36.024 R21_1.2 56.533,36.05 59.251,36.05 R22_1.1 ; U0.6 50.537,87.586 56.508,87.586 R21.2 56.533,87.612 59.251,87.612 R22.1 ; U0_3.6 101.083,36.151 107.054,36.151 R21_3.2 107.079,36.177 109.797,36.177 R22_3.1 ; U0_2.6 101.159,87.586 107.13,87.586 R21_2.2 107.155,87.612 109.873,87.612 R22_2.1
  Bottom Layer w0.61: R17_1.2 R19_1.2 ; R19_1.2@48.579,30.785 50.419,30.785 52.045,32.41 v1(52.045,36.017) 52.045,39.878 50.343,41.58 R20_1.2 R18_1.2 ; R17.2 R19.2 ; R19.2@48.579,82.347 50.419,82.347 52.045,83.972 v1(52.045,87.579) 52.045,91.44 50.343,93.142 R20.2 R18.2 ; R17_3.2 R19_3.2 ; R19_3.2@99.125,30.912 100.965,30.912 102.591,32.537 v1(102.591,36.144) 102.591,40.005 100.889,41.707 R20_3.2 R18_3.2 ; R17_2.2 R19_2.2 ; R19_2.2@99.201,82.347 101.041,82.347 102.667,83.972 v1(102.667,87.579) 102.667,91.44 100.965,93.142 R20_2.2 R18_2.2
NetR22_2: R22.2 R22_1.2 R22_2.2 R22_3.2 R23.2 R23_1.2 R23_2.2 R23_3.2 Vout.1 Vout_1.1 Vout_2.1 Vout_3.1 | length 32
  Top Layer w0.61: R22_1.2 60.702,36.101 62.883,36.101 R23_1.2 66.381,36.133 66.396,36.119 Vout_1.1 ; R22.2 60.702,87.663 62.883,87.663 R23.2 66.381,87.695 66.396,87.681 Vout.1 ; R22_3.2 111.248,36.228 113.429,36.228 R23_3.2 116.928,36.26 116.942,36.246 Vout_3.1 ; R22_2.2 111.324,87.663 113.505,87.663 R23_2.2 117.004,87.695 117.018,87.681 Vout_2.1
NetR24_1: R24.1 R24_1.1 R24_2.1 R24_3.1 RP2.2 RP2_1.2 RP2_2.2 RP2_3.2 | length 55.1
  Top Layer w0.61: v1(42.748,28.219) v1(42.748,29.947) ; v1(42.748,79.781) v1(42.748,81.509) ; v1(93.294,28.346) v1(93.294,30.074) ; v1(93.37,79.781) v1(93.37,81.509)
  Bottom Layer w0.61: R24_1.1@42.723,34.631 42.723,30.048 v1(42.748,29.947) ; R24.1@42.723,86.193 42.723,81.61 v1(42.748,81.509) ; v1(42.748,28.219) 42.824,27.915 RP2_1.2 ; v1(42.748,79.781) 42.824,79.477 RP2.2 ; R24_3.1@93.269,34.758 93.269,30.175 v1(93.294,30.074) ; v1(93.294,28.346) 93.371,28.042 RP2_3.2 ; R24_2.1@93.345,86.193 93.345,81.61 v1(93.37,81.509) ; v1(93.37,79.781) 93.447,79.477 RP2_2.2
NetR26_1: R26.1 R26_1.1 R26_2.1 R26_3.1 U0.5 U0_1.5 U0_2.5 U0_3.5 | length 23.9
  Top Layer w0.61: U0_1.5 50.719,34.747 50.749,34.717 R26_1.1 ; U0.5 50.719,86.309 50.749,86.279 R26.1 ; U0_3.5 101.266,34.874 101.295,34.844 R26_3.1 ; U0_2.5 101.342,86.309 101.371,86.279 R26_2.1
NetRP1_1: RP1.1 RP1_1.1 RP1_2.1 RP1_3.1 U0.1 U0_1.1 U0_2.1 U0_3.1 | length 43.4
  Top Layer w0.61: RP1_1.1 45.279,49.386 U0_1.1 ; RP1.1 45.279,100.948 U0.1 ; RP1_3.1 95.826,49.513 U0_3.1 ; RP1_2.1 95.902,100.948 U0_2.1
NetRP1_3: RP1.3 RP1_1.3 RP1_2.3 RP1_3.3 U0.8 U0_1.8 U0_2.8 U0_3.8 | length 43.8
  Top Layer w0.61: RP1_1.3 50.343,38.695 50.481,38.557 U0_1.8 ; RP1.3 50.343,90.257 50.481,90.119 U0.8 ; RP1_3.3 100.889,38.822 101.027,38.684 U0_3.8 ; RP1_2.3 100.965,90.257 101.103,90.119 U0_2.8
VCC: C1.2 C1_1.2 C1_2.2 C1_3.2 C2.2 C2_1.2 C2_2.2 C2_3.2 C3.2 C3_1.2 C3_2.2 C3_3.2 C11.1 C11_1.1 C11_2.1 C11_3.1 JP1.1 JP1_1.1 JP1_2.1 JP1_3.1 JP2.1 JP2_1.1 JP2_2.1 JP2_3.1 R25.1 R25_1.1 R25_2.1 R25_3.1 RP1.2 RP1_1.2 RP1_2.2 RP1_3.2 RP2.1 RP2_1.1 RP2_2.1 RP2_3.1 U0.7 U0_1.7 U0_2.7 U0_3.7 U1.1 U1_1.1 U1_2.1 U1_3.1 | length 280.1
  Top Layer w0.61: R25_1.1@38.044,62.103 38.43,62.103 ; R25.1@38.044,113.665 38.43,113.665 ; U1_1.1 38.975,59.933 38.975,61.558 38.43,62.103 ; U1.1 38.975,111.495 38.975,113.12 38.43,113.665 ; RP1_1.2 47.803,39.48 49.559,37.723 49.577,37.723 49.934,37.366 49.934,37.317 49.964,37.287 U0_1.7 53.151,37.287 C11_1.1 53.199,37.335 53.214,37.334 54.012,37.324 ; RP1.2 47.803,91.042 49.559,89.285 49.577,89.285 49.934,88.928 49.934,88.879 49.964,88.849 U0.7 53.151,88.849 C11.1 53.199,88.897 53.214,88.896 54.012,88.886 ; C11_1.1@53.175,37.337 C11_1.1@53.188,37.349 ; C11.1@53.175,88.899 C11.1@53.188,88.911 ; 54.026,37.313 56.723,40.264 JP1_1.1 ; 54.026,88.875 56.723,91.826 JP1.1 ; JP2_1.1 55.349,62.103 38.43,62.103 ; JP2.1 55.349,113.665 38.43,113.665 ; R25_3.1@88.59,62.23 88.976,62.23 ; R25_2.1@88.666,113.665 89.052,113.665 ; U1_3.1 89.521,60.06 89.521,61.685 88.976,62.23 ; U1_2.1 89.597,111.495 89.597,113.12 89.052,113.665 ; RP1_3.2 98.349,39.607 100.105,37.85 100.123,37.85 100.48,37.493 100.48,37.444 100.51,37.414 U0_3.7 103.697,37.414 C11_3.1 103.745,37.462 103.76,37.461 104.558,37.451 ; RP1_2.2 98.425,91.042 100.181,89.285 100.199,89.285 100.556,88.928 100.556,88.879 100.586,88.849 U0_2.7 103.773,88.849 C11_2.1 103.821,88.897 103.836,88.896 104.634,88.886 ; C11_3.1@103.721,37.464 C11_3.1@103.734,37.476 ; C11_2.1@103.797,88.899 C11_2.1@103.81,88.911 ; 104.572,37.44 107.269,40.391 JP1_3.1 ; 104.648,88.875 107.345,91.826 JP1_2.1 ; JP2_3.1 105.895,62.23 88.976,62.23 ; JP2_2.1 105.971,113.665 89.052,113.665
  Bottom Layer w0.61: RP2_1.1 53.188,25.781 53.188,36.982 53.213,36.957 v1(53.213,37.262) ; RP2.1 53.188,77.343 53.188,88.544 53.213,88.519 v1(53.213,88.824) ; RP2_3.1 103.734,25.908 103.734,37.109 103.759,37.084 v1(103.759,37.389) ; RP2_2.1 103.81,77.343 103.81,88.544 103.835,88.519 v1(103.835,88.824)
VEE: C4.1 C4_1.1 C4_2.1 C4_3.1 C5.1 C5_1.1 C5_2.1 C5_3.1 C6.1 C6_1.1 C6_2.1 C6_3.1 C12.2 C12_1.2 C12_2.2 C12_3.2 JP1.4 JP1_1.4 JP1_2.4 JP1_3.4 JP2.4 JP2_1.4 JP2_2.4 JP2_3.4 U0.4 U0_1.4 U0_2.4 U0_3.4 | length 159.8
  Top Layer w0.61: C12_1.2@42.824,34.761 42.831,34.754 45.272,34.754 U0_1.4 ; C12.2@42.824,86.323 42.831,86.316 45.272,86.316 U0.4 ; v1(43.833,40.114) 43.833,44.519 v1(43.84,44.526) ; v1(43.833,91.676) 43.833,96.081 v1(43.84,96.088) ; C12_3.2@93.371,34.888 93.378,34.881 95.819,34.881 U0_3.4 ; C12_2.2@93.447,86.323 93.454,86.316 95.894,86.316 U0_2.4 ; v1(94.379,40.241) 94.379,44.646 v1(94.387,44.653) ; v1(94.455,91.676) 94.455,96.081 v1(94.463,96.088)
  Bottom Layer w0.61: v1(43.739,34.747) 43.833,34.842 v1(43.833,40.114) ; v1(43.739,86.309) 43.833,86.404 v1(43.833,91.676) ; v1(43.84,44.526) 61.57,44.526 JP1_1.4 ; v1(43.84,96.088) 61.57,96.088 JP1.4 ; v1(94.285,34.874) 94.379,34.969 v1(94.379,40.241) ; v1(94.361,86.309) 94.455,86.404 v1(94.455,91.676) ; v1(94.387,44.653) 112.116,44.653 JP1_3.4 ; v1(94.463,96.088) 112.192,96.088 JP1_2.4
VREF: C9.2 C9_1.2 C9_2.2 C9_3.2 C10.2 C10_1.2 C10_2.2 C10_3.2 R15.1 R15_1.1 R15_2.1 R15_3.1 R16.2 R16_1.2 R16_2.2 R16_3.2 R26.2 R26_1.2 R26_2.2 R26_3.2 U2.2 U2_1.2 U2_2.2 U2_3.2 | length 279.4
  Top Layer w0.61: U2_1.2 28.59,61.864 28.626,61.9 v1(28.626,61.925) ; U2.2 28.59,113.426 28.626,113.462 v1(28.626,113.487) ; v1(38.659,27.584) 38.659,27.051 39.319,26.391 49.57,26.391 50.604,27.425 50.604,27.475 50.699,27.57 R26_1.2 ; v1(38.659,79.146) 38.659,78.613 39.319,77.953 49.57,77.953 50.604,78.987 50.604,79.037 50.699,79.132 R26.2 ; U2_3.2 79.136,61.991 79.172,62.027 v1(79.172,62.052) ; U2_2.2 79.212,113.426 79.248,113.462 v1(79.248,113.487) ; v1(89.205,27.711) 89.205,27.178 89.865,26.518 100.116,26.518 101.15,27.552 101.15,27.602 101.245,27.697 R26_3.2 ; v1(89.281,79.146) 89.281,78.613 89.941,77.953 100.192,77.953 101.226,78.987 101.226,79.037 101.321,79.132 R26_2.2
  Bottom Layer w0.61: C9_1.2 26.461,61.931 C10_1.2@28.25,61.931 ; C9.2 26.461,113.493 C10.2@28.25,113.493 ; v1(28.626,61.925) 28.626,37.262 38.267,27.621 R15_1.1 ; v1(28.626,113.487) 28.626,88.824 38.267,79.183 R15.1 ; 28.773,52.877 38.361,43.289 38.361,43.239 38.456,43.143 R16_1.2 ; 28.773,104.439 38.361,94.851 38.361,94.801 38.456,94.705 R16.2 ; C9_3.2 77.007,62.058 C10_3.2@78.797,62.058 ; C9_2.2 77.083,113.493 C10_2.2@78.873,113.493 ; v1(79.172,62.052) 79.172,37.389 88.813,27.748 R15_3.1 ; v1(79.248,113.487) 79.248,88.824 88.889,79.183 R15_2.1 ; 79.319,53.004 88.907,43.416 88.907,43.366 89.003,43.27 R16_3.2 ; 79.395,104.439 88.983,94.851 88.983,94.801 89.079,94.705 R16_2.2
pads on no net: R5.1 R5_1.1 R5_2.1 R5_3.1

## Polygon pours and split planes (outlines as drawn)
GND on Top Layer (solid, remove dead copper, pour order 60): 22.224,118.719 22.809,119.304 122.225,119.304 122.225,19.914 121.742,19.431 22.123,19.431
GND on Top Layer "Top Layer-No Net" (solid, remove dead copper, pour order 56): 73.076,19.558 73.127,19.609 121.92,19.609 121.92,67.564 121.793,67.691 73.178,67.691
GND on Top Layer "Top Layer-No Net" (solid, remove dead copper, pour order 52): 73.152,70.993 73.203,71.044 121.996,71.044 121.996,118.999 121.869,119.126 73.254,119.126
GND on Top Layer "Top Layer-No Net" (solid, remove dead copper, pour order 48): 22.53,19.431 22.581,19.482 71.374,19.482 71.374,67.437 71.247,67.564 22.631,67.564
GND on Top Layer "Top Layer-No Net" (solid, remove dead copper, pour order 40): 22.53,70.993 22.581,71.044 71.374,71.044 71.374,118.999 71.247,119.126 22.631,119.126
GND on Bottom Layer (solid, remove dead copper, pour order 62): 22.276,119.202 122.301,119.202 122.225,119.126 122.225,19.304 22.479,19.304 22.352,19.177
GND on Bottom Layer "Bottom Layer-No Net" (solid, remove dead copper, pour order 58): 73.101,67.539 121.844,67.539 121.92,67.462 121.895,67.437 121.895,19.634 73.228,19.634 73.178,19.685
GND on Bottom Layer "Bottom Layer-No Net" (solid, remove dead copper, pour order 54): 73.177,118.974 121.92,118.974 121.996,118.897 121.971,118.872 121.971,71.069 73.304,71.069 73.254,71.12
GND on Bottom Layer "Bottom Layer-No Net" (solid, remove dead copper, pour order 50): 22.555,67.412 71.298,67.412 71.374,67.335 71.349,67.31 71.349,19.507 22.682,19.507 22.631,19.558
GND on Bottom Layer "Bottom Layer-No Net" (solid, remove dead copper, pour order 42): 22.555,118.974 71.298,118.974 71.374,118.897 71.349,118.872 71.349,71.069 22.682,71.069 22.631,71.12

## Keep-outs
Keep-Out Layer:
  lines w0.254: 22.276,67.64 22.276,19.253 22.352,19.177 71.679,19.177 ; 22.352,70.739 22.276,70.815 22.276,119.202 71.679,119.202 ; 72.822,19.38 72.898,19.304 122.225,19.304 ; 72.898,119.202 122.301,119.202 122.301,70.739 ; 122.225,67.767 122.225,19.304 ; 122.225,19.304 122.225,119.304 22.225,119.304 22.225,19.304 122.225,19.304

## Other copper
Top Layer:
  rectangle net VCC: 105.156,47.219 109.373,65.989
  rectangle net VEE: 117.12,47.092 121.26,66.065
  rectangle net VCC: 105.232,98.654 109.449,117.424
  rectangle net VEE: 117.196,98.527 121.336,117.5
  rectangle net VCC: 54.61,47.092 58.826,65.862
  rectangle net VEE: 66.573,46.965 70.714,65.938
  rectangle net VCC: 54.61,98.654 58.826,117.424
  rectangle net VEE: 66.573,98.527 70.714,117.5
  pour cut-out: 94.669,39.421 102.21,39.421 102.21,34.239 94.869,34.239 94.742,34.112
  pour cut-out: 91.469,37.011 91.473,37.008 93.117,37.008 93.117,36.5 92.99,36.373 92.815,36.547 91.469,36.547
  pour cut-out: 78.943,29.853 89.688,29.853 89.688,28.397 78.943,28.397
  pour cut-out: 79.451,42.654 90.196,42.654 90.196,41.199 79.451,41.199
  pour cut-out: 105.715,36.889 116.459,36.889 116.459,35.433 105.715,35.433
  pour cut-out: 94.745,90.856 102.286,90.856 102.286,85.674 94.945,85.674 94.818,85.547
  pour cut-out: 91.545,88.446 91.549,88.443 93.193,88.443 93.193,87.935 93.066,87.808 92.891,87.982 91.545,87.982
  pour cut-out: 79.019,81.288 89.764,81.288 89.764,79.832 79.019,79.832
  pour cut-out: 79.527,94.089 90.272,94.089 90.272,92.634 79.527,92.634
  pour cut-out: 105.791,88.324 116.535,88.324 116.535,86.868 105.791,86.868
  pour cut-out: 44.123,39.294 51.664,39.294 51.664,34.112 44.323,34.112 44.196,33.985
  pour cut-out: 40.923,36.884 40.926,36.881 42.57,36.881 42.57,36.373 42.443,36.246 42.269,36.42 40.923,36.42
  pour cut-out: 28.397,29.726 39.141,29.726 39.141,28.27 28.397,28.27
  pour cut-out: 28.905,42.527 39.649,42.527 39.649,41.072 28.905,41.072
  pour cut-out: 55.169,36.762 65.913,36.762 65.913,35.306 55.169,35.306
  pour cut-out: 44.123,90.856 51.664,90.856 51.664,85.674 44.323,85.674 44.196,85.547
  pour cut-out: 40.923,88.446 40.926,88.443 42.57,88.443 42.57,87.935 42.443,87.808 42.269,87.982 40.923,87.982
  pour cut-out: 28.397,81.288 39.141,81.288 39.141,79.832 28.397,79.832
  pour cut-out: 28.905,94.089 39.649,94.089 39.649,92.634 28.905,92.634
  pour cut-out: 55.169,88.324 65.913,88.324 65.913,86.868 55.169,86.868
Bottom Layer:
  rectangle net VCC: 105.156,47.092 109.195,66.065
  rectangle net VEE: 117.145,47.269 121.184,65.989
  rectangle net VCC: 105.232,98.527 109.271,117.5
  rectangle net VEE: 117.221,98.704 121.26,117.424
  rectangle net VCC: 54.61,46.965 58.649,65.938
  rectangle net VEE: 66.599,47.142 70.637,65.862
  rectangle net VCC: 54.61,98.527 58.649,117.5
  rectangle net VEE: 66.599,98.704 70.637,117.424

## Silkscreen, mask and mechanical layers (free items; w line width, h text height)
Top Overlay:
  lines w0.254: 22.631,19.558 22.631,67.462 71.298,67.462 71.298,19.558 22.631,19.558 ; 22.631,71.12 22.631,119.024 71.298,119.024 71.298,71.12 22.631,71.12 ; 73.178,19.685 73.178,67.589 121.844,67.589 121.844,19.685 73.178,19.685 ; 73.254,71.12 73.254,119.024 121.92,119.024 121.92,71.12 73.254,71.12
  text "VCC" at 54.737,107.747 h1.52
  text "VCC" at 105.359,107.747 h1.52
  text "VEE" at 66.624,107.594 h1.52
  text "VEE" at 117.246,107.594 h1.52
  text "VCC" at 105.283,56.312 h1.52
  text "VCC" at 54.737,56.185 h1.52
  text "VEE" at 117.17,56.159 h1.52
  text "VEE" at 66.624,56.032 h1.52